# EAGLE board brush (EAGLE 9.5.1)
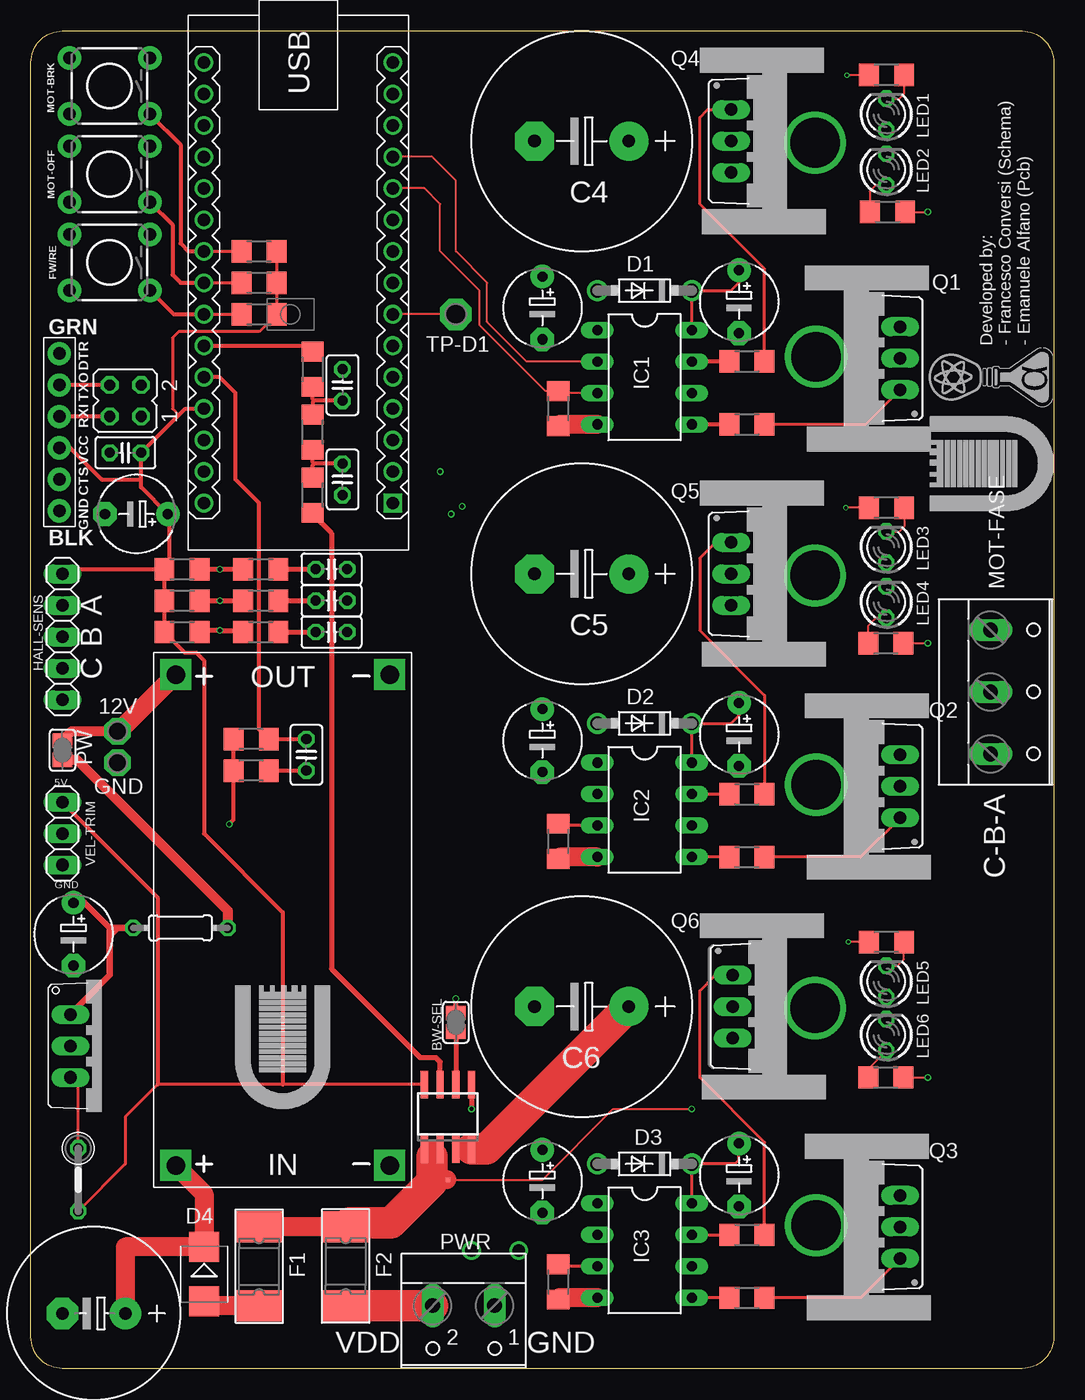
[diagram p0: board, top side]
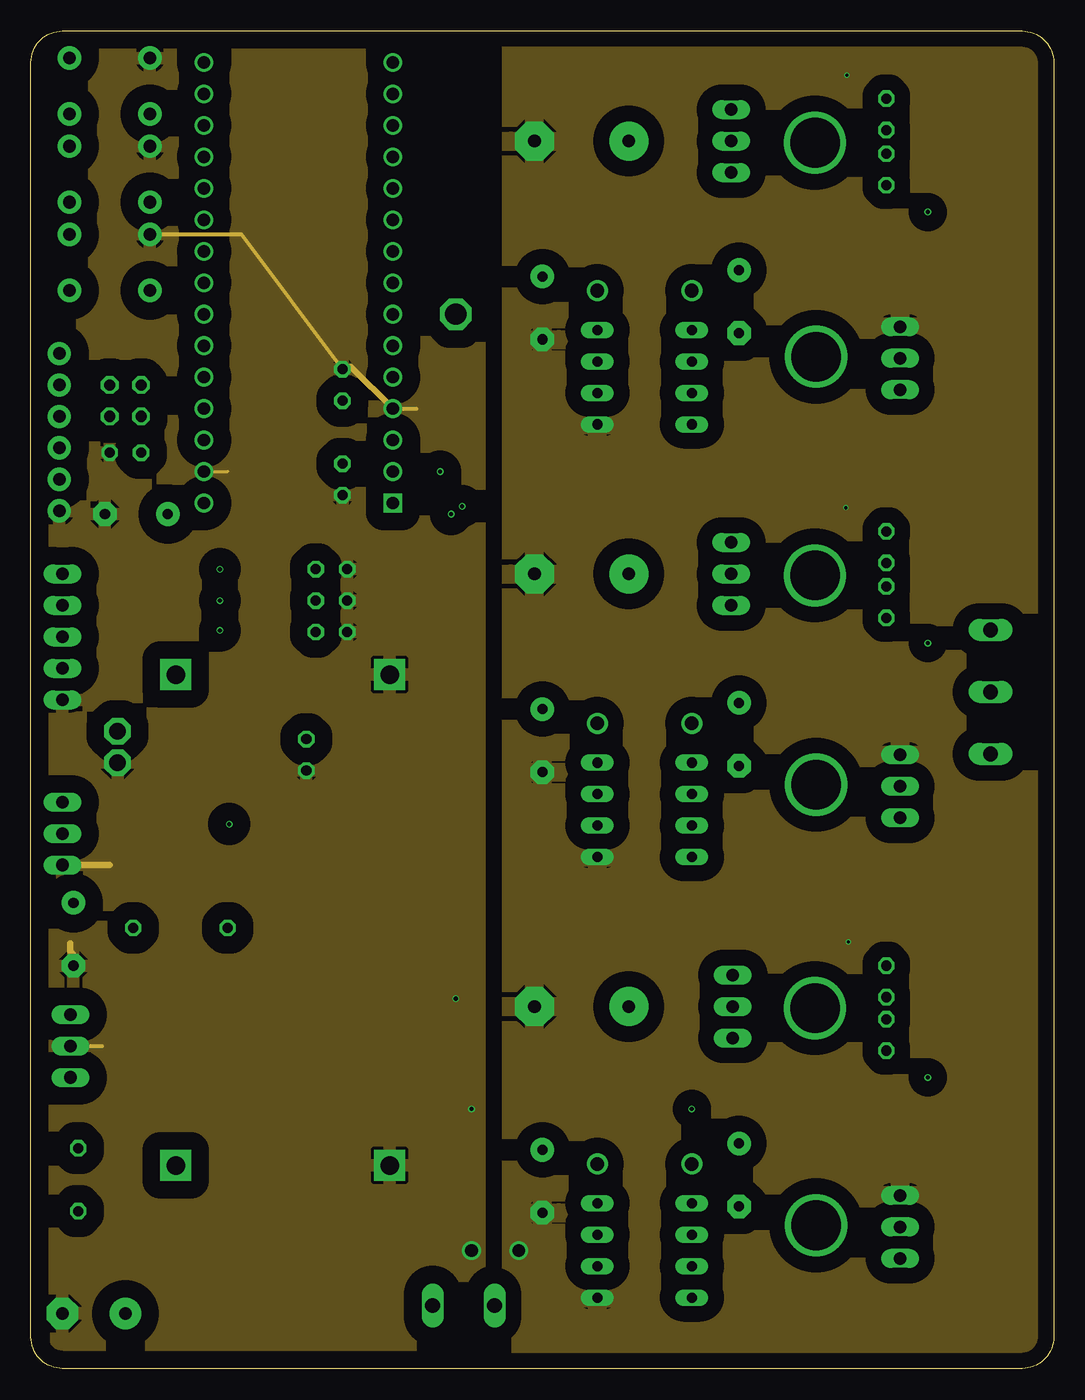
[diagram p1: board, inner layer Route2]
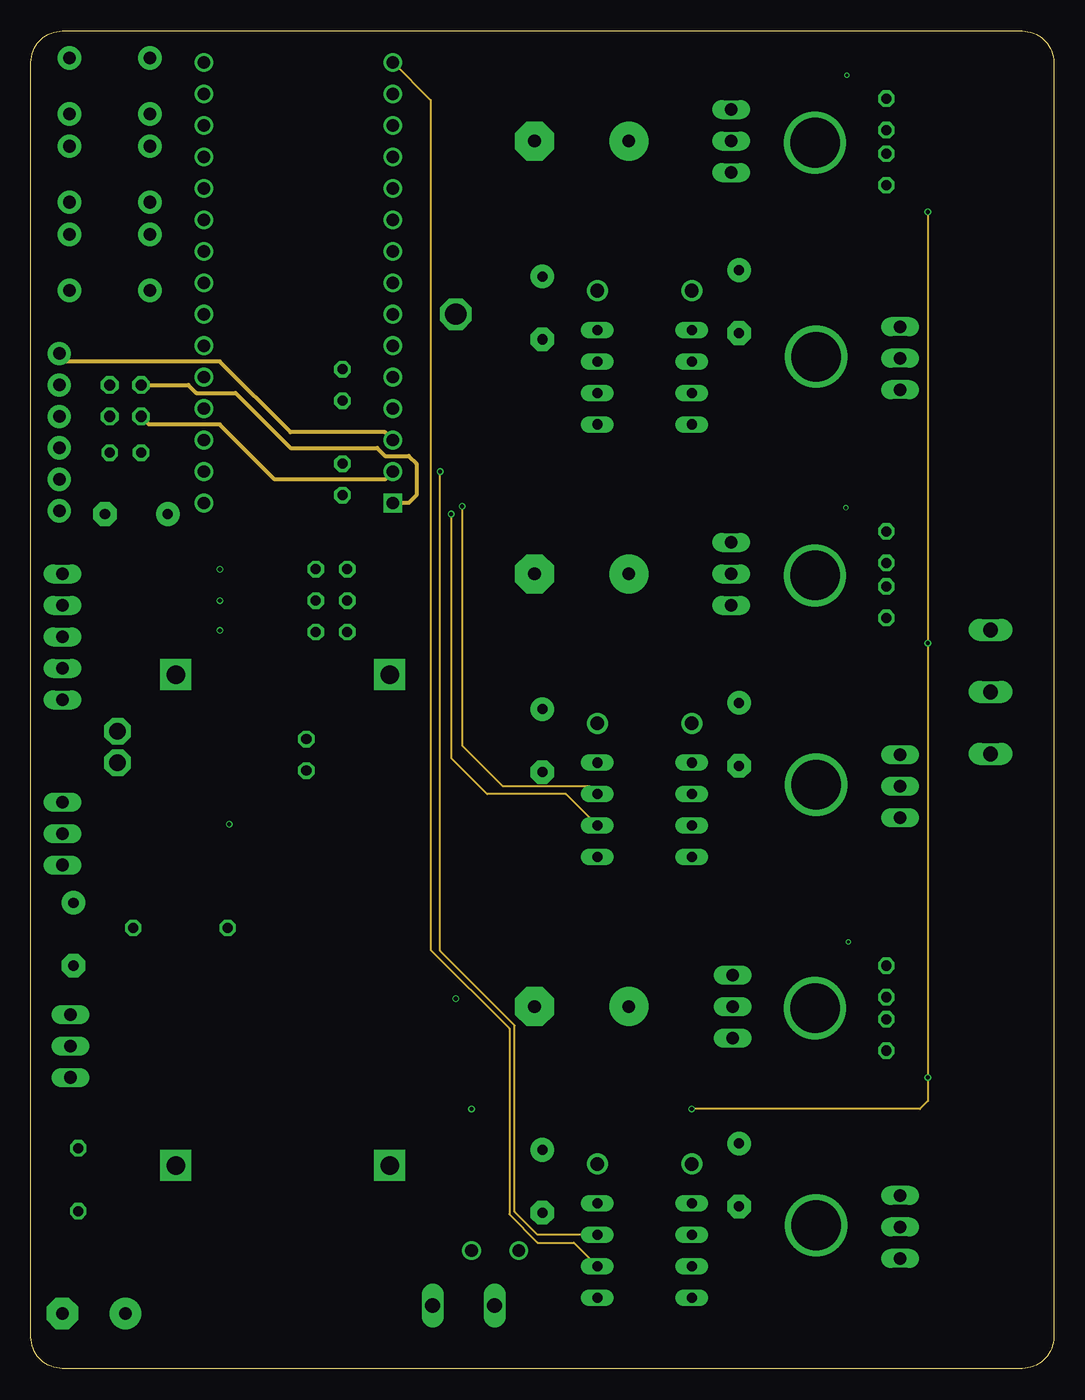
[diagram p2: board, inner layer Route15]
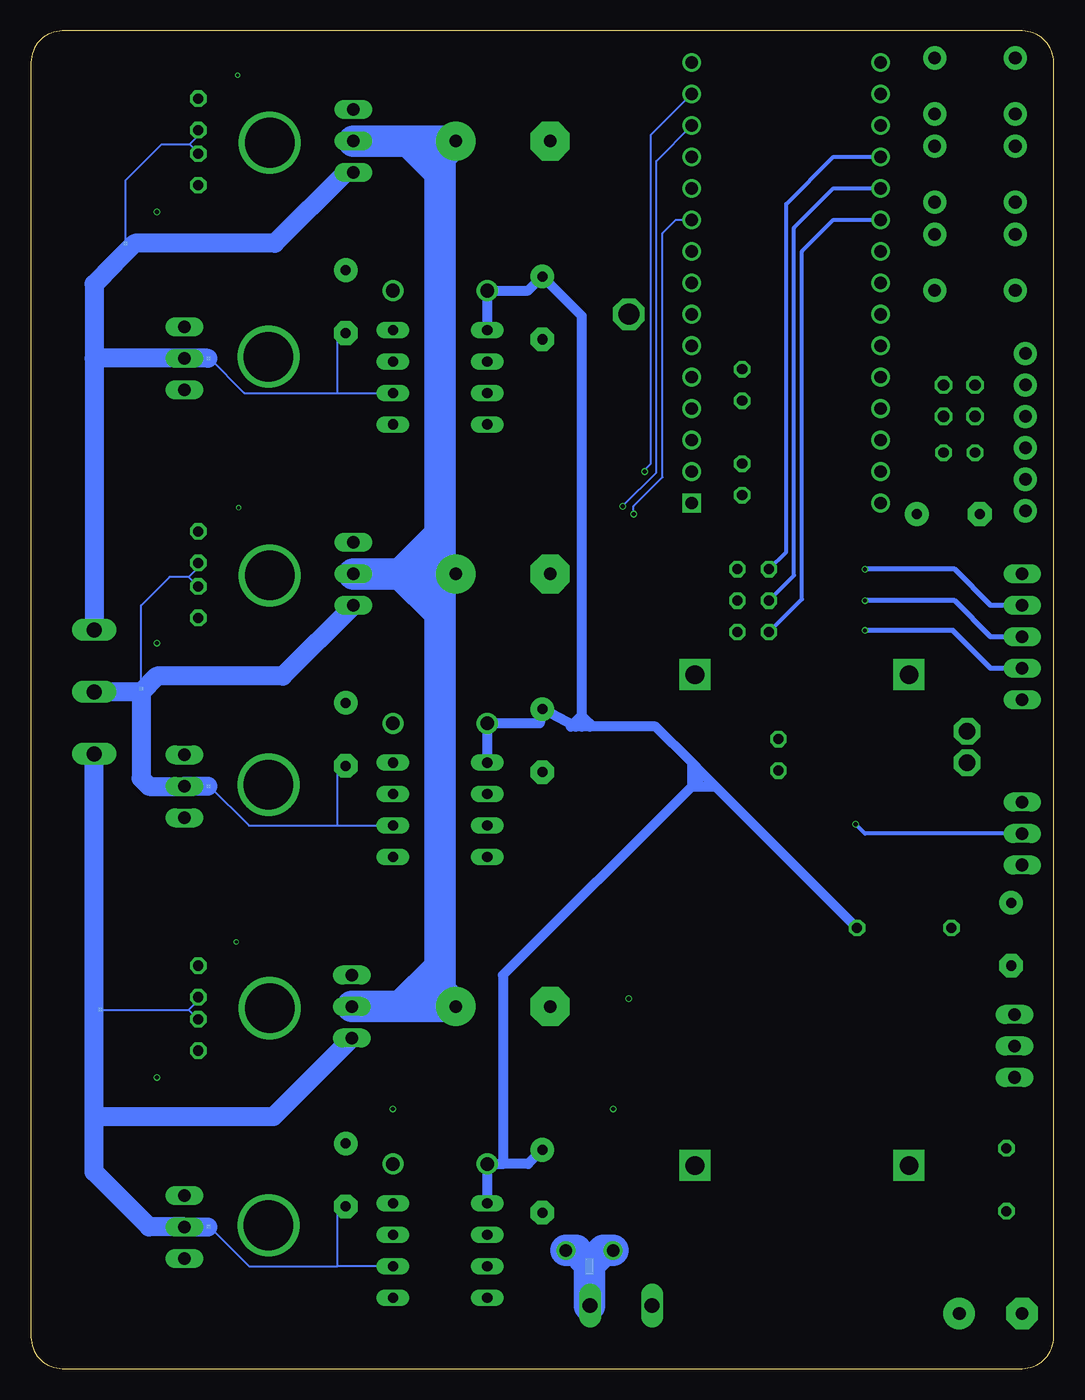
[diagram p3: board, bottom side, seen from below]

Size 82.55 x 107.95 mm. Coordinates in mm from the lower left corner, seen from the top.
Outline: 80.01,0 2.54,0 arc-90 0,2.54 0,105.41 arc-90 2.54,107.95 80.01,107.95 arc-90 82.55,105.41 82.55,2.54 arc-90 80.01,0
Copper layers (1+2*15+16): Top 0.035mm / dielectric 0.2mm / Route2 0.0175mm / dielectric 1.1mm / Route15 0.0175mm / dielectric 0.2mm / Bottom 0.035mm
Design rules "JLCPCB_4layer_DRU": minimum track width 3.5mil, minimum drill 0.2mm, track to track 3.5mil, track to pad 5mil, pad to pad 5mil, via to via 5mil, smd to smd 0mil, copper to edge 12mil, drill to drill 12mil, minimum pad ring 10mil, minimum via ring 3mil, stop-mask expansion 2mil, vias tented up to drill 100mil, thermal gap 10mil
Net classes: 0 default: width 0.152 mm, clearance 0.152 mm; 1 PWR_Mot: width 1.524 mm, drill 1.016 mm, clearance 0.305 mm; 2 PWR_logic: width 0.254 mm, drill 0.152 mm, clearance 0.203 mm; 3 AC_signal: width 0.152 mm, clearance 0.152 mm

## Footprints (pad centres in the part's own frame; a part is rotated, then mirrored left to right if it is on the bottom)
P1-13 = drill 1.321 pad 2.159 octagon: TP 0,0
SJ = smd 1.168 x 1.6: 1 -0.762,0; 2 0.762,0
E5-6 = drill 0.813 pad 1.905: + -2.54,0 | drill 0.813 pad 1.905 octagon: - 2.54,0
E7,5-18 = drill 1.016 pad 3.15: + -3.81,0 | drill 1.016 pad 3.15 octagon: - 3.81,0
C025-025X050 = drill 0.813 octagon: 1 -1.27,0; 2 1.27,0
E5-13 = drill 1.016 pad 2.54: + -2.54,0 | drill 1.016 pad 2.54 octagon: - 2.54,0
DO41-7.6 = drill 1.1 pad 1.7: A 3.81,0; C -3.81,0
SMB = smd 2.4 x 2.4: A 2.2,0; C -2.2,0
BELFUSE0679-3000-12 = smd 2.5 x 3.81: 1 -3.175,0; 2 3.175,0
TACTILE_SWITCH_PTH_6.0MM = drill 1.016 pad 1.88: 1 -3.251,2.261; 2 3.251,2.261; 3 -3.251,-2.261; 4 3.251,-2.261
1X05 = drill 1.016 long: 1 -5.08,0; 2 -2.54,0; 3 0,0; 4 2.54,0; 5 5.08,0
DIL08 = drill 0.813 long: 1 -3.81,-3.81; 2 -1.27,-3.81; 3 1.27,-3.81; 4 3.81,-3.81; 5 3.81,3.81; 6 1.27,3.81; 7 -1.27,3.81; 8 -3.81,3.81
SOIC8 = smd 0.6 x 2.2: 1 -1.905,-2.6; 2 -0.635,-2.6; 3 0.635,-2.6; 4 1.905,-2.6; 5 1.905,2.6; 6 0.635,2.6; 7 -0.635,2.6; 8 -1.905,2.6
TO220V = drill 1.016 long: 1 -2.54,-2.54; 2 0,-2.54; 3 2.54,-2.54
6_PIN_SERIAL_TARGET_SIDE_W_SILK = drill 1.016 pad 1.88: P$1 -6.35,0; P$2 -3.81,0; P$3 -1.27,0; P$4 1.27,0; P$5 3.81,0; P$6 6.35,0
JP2Q = drill 0.914 octagon: 1 -1.27,-1.27; 2 -1.27,1.27; 3 1.27,-1.27; 4 1.27,1.27
0207/5V = drill 0.813 octagon: 1 -2.54,0; 2 2.54,0
LED3MM = drill 0.813 octagon: A -1.27,0; K 1.27,0
ARDUINO-NANO-3.0 = drill 1 square: J1.1 17.78,7.62 | drill 1: J1.2 15.24,7.62; J1.3 12.7,7.62; J1.4 10.16,7.62; J1.5 7.62,7.62; J1.6 5.08,7.62; J1.7 2.54,7.62; J1.8 0,7.62; J1.9 -2.54,7.62; J1.10 -5.08,7.62; J1.11 -7.62,7.62; J1.12 -10.16,7.62; J1.13 -12.7,7.62; J1.14 -15.24,7.62; J1.15 -17.78,7.62; J2.1 17.78,-7.62; J2.2 15.24,-7.62; J2.3 12.7,-7.62; J2.4 10.16,-7.62; J2.5 7.62,-7.62; J2.6 5.08,-7.62; J2.7 2.54,-7.62; J2.8 0,-7.62; J2.9 -2.54,-7.62; J2.10 -5.08,-7.62; J2.11 -7.62,-7.62; J2.12 -10.16,-7.62; J2.13 -12.7,-7.62; J2.14 -15.24,-7.62; J2.15 -17.78,-7.62
W237-103 = drill 1.194 long: 1 -5,-1.29; 2 0,-1.29; 3 5,-1.29
DC-DC-STEP-DOWN-LM2596-ALFY = drill 1.5 pad 2.5 square: IN+ -19.812,9.906; IN- -19.812,-7.366; OUT+ 19.812,9.906; OUT- 19.812,-7.366
W237-102 = drill 1.194 long: 1 -2.5,-1.27; 2 2.5,-1.27
TO220BV = drill 1.016 long: D 0,-2.54; G -2.54,-2.54; S 2.54,-2.54
R1206 = smd 1.6 x 1.803: 1 -1.422,0; 2 1.422,0
0204/7 = drill 0.813 octagon: 1 -3.81,0; 2 3.81,0
P1-17 = drill 1.702 pad 2.54 octagon: TP 0,0
NET-NET_12X12MIL = smd 0.152 x 0.305: N1 -0.076,0; N2 0.076,0
TO-220 = drill 4: P$1 0.127,6.762
3NET-25X50MIL = smd 0.635 x 0.635: COM 0,0.318 | smd 0.318 x 0.635: S1 0.159,-0.318; S2 -0.159,-0.318
1X03 = drill 1.016 long: 1 -2.54,0; 2 0,0; 3 2.54,0

## Placement (x,y rotation side)
12V  TPSPAD1-13  [P1-13]  6.99,51.44 0 top
BW-SEL  [SJ]  34.29,27.94 270 top
C1  2.2u  [E5-6]  57.15,86.11 270 top
C2  2.2u  [E5-6]  57.15,51.18 270 top
C3  2.2u  [E5-6]  57.15,15.62 270 top
C4  270u/50V  [E7,5-18]  44.45,99.06 180 top
C5  270u/50V  [E7,5-18]  44.45,64.14 180 top
C6  270u/50V  [E7,5-18]  44.45,29.21 180 top
C7  10u  [E5-6]  41.27,85.6 270 top
C8  10u  [E5-6]  41.27,50.67 270 top
C9  10u  [E5-6]  41.27,15.11 270 top
C10  10n  [C025-025X050]  24.26,64.52 0 top
C11  10n  [C025-025X050]  24.26,61.98 0 top
C12  10n  [C025-025X050]  24.26,59.44 0 top
C13  10n  [C025-025X050]  22.23,49.53 270 top
C14  1n  [C025-025X050]  25.15,71.75 270 top
C15  10n  [C025-025X050]  25.15,79.38 90 top
C16  10u  [E5-6]  8.51,68.96 180 top
C17  100n  [C025-025X050]  7.62,73.91 180 top
C18  470u/50V  [E5-13]  5.08,4.45 180 top
C19  10u  [E5-6]  3.43,35.05 270 top
D1  1N5819-B  [DO41-7.6]  49.53,87 180 top
D2  1N5819-B  [DO41-7.6]  49.53,52.07 180 top
D3  1N5819-B  [DO41-7.6]  49.53,16.51 180 top
D4  ES2D  [SMB]  13.97,7.62 270 top
F1  2410-BOX  [BELFUSE0679-3000-12]  18.41,8.26 90 top
F2  2410-BOX  [BELFUSE0679-3000-12]  25.4,8.26 270 top
FW/RE  MOMENTARY-SWITCH-SPST-PTH-6.0MM  [TACTILE_SWITCH_PTH_6.0MM]  6.35,89.28 180 top
GND  TPSQPAD1-13  [P1-13]  6.99,48.9 180 top
HALL-SENS  [1X05]  2.54,59.05 270 top
IC1  IR2108D  [DIL08]  49.53,80.01 270 top
IC2  IR2108D  [DIL08]  49.53,45.09 270 top
IC3  IR2108D  [DIL08]  49.53,9.53 270 top
IC4  ACS723  [SOIC8]  33.66,20.32 0 top
IC5  7805TV  [TO220V]  5.71,26.04 270 top
J1  [6_PIN_SERIAL_TARGET_SIDE_W_SILK]  2.29,75.56 270 top
JP1  [JP2Q]  7.62,78.11 90 top
L1  10u  [0207/5V]  3.81,15.24 270 top
LED1  [LED3MM]  69.05,101.22 90 top
LED2  [LED3MM]  69.05,96.77 90 top
LED3  [LED3MM]  69.05,66.29 90 top
LED4  [LED3MM]  69.05,61.85 90 top
LED5  [LED3MM]  69.05,31.24 90 top
LED6  [LED3MM]  69.05,26.92 90 top
M1  ARDUINO-NANO-3.0  [ARDUINO-NANO-3.0]  21.59,87.63 270 top
MOT-BRK  MOMENTARY-SWITCH-SPST-PTH-6.0MM  [TACTILE_SWITCH_PTH_6.0MM]  6.35,103.5 180 top
MOT-FASE  [W237-103]  78.74,54.61 270 top
MOT-OFF  MOMENTARY-SWITCH-SPST-PTH-6.0MM  [TACTILE_SWITCH_PTH_6.0MM]  6.35,96.39 180 top
PW  [SJ]  2.54,49.91 270 top
PW$1  DC/DC-STEP-DOWNOLD-ALFY  [DC-DC-STEP-DOWN-LM2596-ALFY]  21.59,36.2 90 top
PWR  [W237-102]  34.92,3.81 180 top
Q1  IRFB4310  [TO220BV]  67.61,81.53 90 top
Q2  IRFB4310  [TO220BV]  67.61,46.99 90 top
Q3  IRFB4310  [TO220BV]  67.61,11.43 90 top
Q4  IRFB4310  [TO220BV]  59.05,99.06 270 top
Q5  IRFB4310  [TO220BV]  59.05,64.14 270 top
Q6  IRFB4310  [TO220BV]  59.18,29.21 270 top
R1  22  [R1206]  57.78,81.28 180 top
R2  22  [R1206]  57.78,76.2 180 top
R3  22  [R1206]  57.78,46.35 180 top
R4  22  [R1206]  57.78,41.27 180 top
R5  22  [R1206]  57.78,10.79 180 top
R6  22  [R1206]  57.78,5.71 180 top
R7  10k  [R1206]  42.55,77.47 90 top
R8  10k  [R1206]  42.55,42.55 90 top
R9  10k  [R1206]  42.55,6.99 90 top
R10  100  [R1206]  22.73,80.64 90 top
R11  1k  [R1206]  22.73,75.56 270 top
R12  1k  [R1206]  22.73,70.48 270 top
R13  1k  [R1206]  18.54,64.52 180 top
R14  1k  [R1206]  18.54,61.98 180 top
R15  1k  [R1206]  18.54,59.44 180 top
R16  1k  [R1206]  17.78,50.8 0 top
R17  47k  [R1206]  17.78,48.26 0 top
R18  22  [0204/7]  12.06,35.56 0 top
R19  1k  [R1206]  12.19,64.52 180 top
R20  1k  [R1206]  12.19,61.98 180 top
R21  1k  [R1206]  12.19,59.44 180 top
R100  5.6k  [R1206]  18.41,90.17 180 top
R101  5.6k  [R1206]  18.41,87.63 180 top
R102  5.6k  [R1206]  18.41,85.09 180 top
R103  5.6k  [R1206]  69.05,34.42 0 top
R104  5.6k  [R1206]  69,23.5 180 top
R105  5.6k  [R1206]  69.05,69.47 0 top
R106  5.6k  [R1206]  69,58.55 180 top
R107  5.6k  [R1206]  69.05,104.39 0 top
R108  5.6k  [R1206]  69.13,93.34 180 top
TP-D1  PTR1PAD1-17  [P1-17]  34.29,85.09 0 top
U$1  NET12X12  [NET-NET_12X12MIL]  74.93,90.81 270 bottom
U$2  NET12X12  [NET-NET_12X12MIL]  73.66,54.86 270 bottom
U$3  DISSTO-220  [TO-220]  70.14,81.53 90 top
U$4  DISSTO-220  [TO-220]  70.14,46.99 90 top
U$6  NET12X12  [NET-NET_12X12MIL]  76.96,28.96 180 bottom
U$7  DISSTO-220  [TO-220]  70.14,11.43 90 top
U$8  DISSTO-220  [TO-220]  56.52,99.06 270 top
U$9  DISSTO-220  [TO-220]  56.52,64.14 270 top
U$10  DISSTO-220  [TO-220]  56.52,29.21 270 top
U$11  NET12X12  [NET-NET_12X12MIL]  68.2,81.53 180 bottom
U$12  NET12X12  [NET-NET_12X12MIL]  68.2,11.43 180 bottom
U$13  NET12X12  [NET-NET_12X12MIL]  68.2,46.99 180 bottom
U$14  NET12X12  [NET-NET_12X12MIL]  33.66,15.24 180 top
U$15  [TOR_10MM]  20.32,26.67 0 top
U$16  [TOR_10MM]  76.83,73.03 90 top
U$17  [ALFY_10MM]  77.47,80.01 90 top
U$100  3NET25X50MIL  [3NET-25X50MIL]  37.47,8.26 180 bottom
VEL-TRIM  [1X03]  2.54,43.18 270 top

## Library data of the parts
12V GND TP-D1 = testpad
BW-SEL JP1 PW = jumper
C1-C19 = rcl; SPICEPREFIX: C
D1-D4 = diode
F1 F2 = polyfuse-smd_10
FW/RE MOT-BRK MOT-OFF = SparkFun-Switches; PROD_ID: SWCH-08441; SF_SKU: COM-00097
HALL-SENS VEL-TRIM = pinhead
IC1-IC3 = irs
IC4 = allegro-2
IC5 = linear
J1 = SparkFun-Connectors
L1 = rcl; SPICEPREFIX: L
LED1-LED6 = led
M1 PW$1 = diy-modules
MOT-FASE = con-wago-500; MPN: 237-103; OC_FARNELL: unknown; OC_NEWARK: 18M7116
PWR = con-wago-500; MPN: 237-102; OC_FARNELL: unknown; OC_NEWARK: 70K9898
Q1-Q6 = transistor-power
R1-R21 R100-R108 = rcl; SPICEPREFIX: R
U$1 U$2 U$6 U$11-U$14 U$100 = junctions_net
U$3 U$4 U$7-U$10 = diss
U$15-U$17 = loghi

## Nets
3V3: M1.J2.14
+5V [PWR_logic]: C16.+ C17.1 HALL-SENS.1 IC4.8 J1.P$4 L1.2 M1.J2.4 R19.2 R20.2 R21.2 R100.1 R101.1 R102.1 VEL-TRIM.1
+12V [PWR_logic]: C7.+ C8.+ C9.+ D1.A D2.A D3.A IC1.1 IC2.1 IC3.1 PW.2 R18.2
A [PWR_Mot]: MOT-FASE.1 Q1.D Q4.S U$1.N2 U$11.N2
A-SENS [AC_signal]: LED1.A LED2.K U$1.N1
B [PWR_Mot]: MOT-FASE.2 Q2.D Q5.S U$2.N2 U$13.N2
B-SENS [AC_signal]: LED3.A LED4.K U$2.N1
C [PWR_Mot]: MOT-FASE.3 Q3.D Q6.S U$6.N2 U$12.N2
C-SENS [AC_signal]: LED5.A LED6.K U$6.N1
F-A: HALL-SENS.2 R13.2 R19.1
F-B: HALL-SENS.3 R14.2 R20.1
F-C: HALL-SENS.4 R15.2 R21.1
FW/RE: FW/RE.1 M1.J2.7 R102.2
GND [PWR_logic]: BW-SEL.1 C10.2 C11.2 C12.2 C13.2 C14.2 C15.2 C16.- C17.2 C18.- C19.- FW/RE.3 GND.TP HALL-SENS.5 IC4.5 IC5.2 J1.P$6 M1.J1.4 M1.J2.2 MOT-BRK.3 MOT-OFF.3 PW$1.IN- PW$1.OUT- R17.2 U$100.S2 VEL-TRIM.3
I_MOT: M1.J2.6 R10.2
IN_A: IC1.3 M1.J1.11 R7.2
IN_B: IC2.3 M1.J1.10 R8.2
IN_C: IC3.3 M1.J1.15 R9.2
MOT_BRK: M1.J2.9 MOT-BRK.1 R100.2
MOT_OFF: M1.J2.8 MOT-OFF.1 R101.2
N$1 [PWR_logic]: IC1.7 R1.2
N$2 [PWR_logic]: IC1.5 R2.2
N$3 [PWR_logic]: Q4.G R1.1
N$4 [PWR_logic]: Q1.G R2.1
N$5 [PWR_logic]: IC2.7 R3.2
N$6 [PWR_logic]: Q5.G R3.1
N$7 [PWR_logic]: IC2.5 R4.2
N$8 [PWR_logic]: Q2.G R4.1
N$9 [PWR_logic]: IC3.7 R5.2
N$10 [PWR_logic]: Q6.G R5.1
N$11 [PWR_logic]: IC3.5 R6.2
N$12 [PWR_logic]: Q3.G R6.1
N$13 [PWR_Mot]: F2.2 PWR.2
N$14 [PWR_logic]: 12V.TP PW$1.OUT+ PW.1
N$16 [PWR_Mot]: D4.A F1.1
N$18 [PWR_Mot]: PWR.1 U$100.COM
N$19 [AC_signal]: LED2.A R108.2
N$20 [AC_signal]: LED1.K R107.2
N$21: C13.1 M1.J2.5 R16.2
N$22 [AC_signal]: LED4.A R106.2
N$23 [AC_signal]: LED3.K R105.2
N$24: M1.J1.7 TP-D1.TP
N$25 [AC_signal]: LED6.A R104.2
N$26 [AC_signal]: LED5.K R103.2
N$27 [PWR_Mot]: C18.+ D4.C PW$1.IN+
N$28: C15.1 R10.1 R11.1
N$29: IC4.7 R12.2
N$30 [PWR_logic]: C19.+ IC5.1 R18.1
N$31 [PWR_logic]: IC5.3 L1.1
N$32: BW-SEL.2 IC4.6
N$33: R16.1 R17.1 VEL-TRIM.2
N$34: J1.P$2 JP1.4
N$35: J1.P$3 JP1.2
N$36: C14.1 R11.2 R12.1
PHASE_A: C10.1 M1.J2.12 R13.1
PHASE_B: C11.1 M1.J2.11 R14.1
PHASE_C: C12.1 M1.J2.10 R15.1
PWM_A: IC1.2 M1.J1.12
PWM_B: IC2.2 M1.J1.13
PWM_C: IC3.2 M1.J1.14
RESET: J1.P$1 M1.J1.3
RXD: JP1.1 M1.J1.2
TXD: JP1.3 M1.J1.1
V+ [PWR_Mot]: F1.2 F2.1 IC4.1 IC4.2 U$14.N2
VBA [PWR_logic]: C1.+ D1.C IC1.8
VBB [PWR_logic]: C2.+ D2.C IC2.8
VBC [PWR_logic]: C3.+ D3.C IC3.8
VCCINT [AC_signal]: R104.1 R106.1 R108.1 U$14.N1
VDD [PWR_Mot]: C4.+ C5.+ C6.+ IC4.3 IC4.4 Q4.D Q5.D Q6.D
VIN: M1.J2.1
VS-A [AC_signal]: C1.- IC1.6 U$11.N1
VS-B [AC_signal]: C2.- IC2.6 U$13.N1
VS-C [AC_signal]: C3.- IC3.6 U$12.N1
VSS [PWR_Mot]: C4.- C5.- C6.- C7.- C8.- C9.- IC1.4 IC2.4 IC3.4 Q1.S Q2.S Q3.S R7.1 R8.1 R9.1 R103.1 R105.1 R107.1 U$100.S1

## Tracks (layer width: path | path; a pad name or v marks a point on that pad's centre or on a via)
+5V
  Top 0.254: IC4.8 20.32,22.92 10.22,22.92 7.62,20.32 7.62,16.51 L1.2 | R100.1 R101.1 R102.1 18.44,83.69 11.94,83.69 11.43,83.19 11.43,77.47 11.94,76.96
  Top 0.305: HALL-SENS.1 2.92,64.52 R19.2 | R19.2 R20.2 R21.2 12.42,57.78 13.34,57.78 13.97,57.15 13.97,43.18 20.32,36.83 20.32,22.92 | R19.2 11.15,64.9 11.15,68.86 C16.+ 8.89,71.12 8.89,71.75 | 8.89,71.75 C17.1 11.94,76.96 12.45,77.47 M1.J2.4 | VEL-TRIM.1 10.22,38.04 10.22,22.92 | J1.P$4 3.17,74.3 5.71,71.75 8.89,71.75
+12V
  Top 0.813: PW.2 3.68,49.15 15.88,36.96 R18.2
  Bottom 0.813: R18.2 27.3,46.99 | 27.3,46.99 28.26,47.94 | 28.26,47.94 29.21,48.9 | 29.21,48.9 32.13,51.82 37.47,51.82 | 37.47,51.82 38.1,51.82 | 38.1,51.82 38.6,51.82 | 38.6,51.82 38.99,51.82 38.1,52.7 | 38.6,51.82 C8.+ 41.5,52.07 D2.A IC2.1 | 44.45,16.51 44.45,31.75 29.21,46.99 | 44.45,16.51 D3.A IC3.1 | 29.21,46.99 28.26,47.94 | IC1.1 D1.A 42.42,87 C7.+ 38.1,84.96 38.1,52.7 | 38.1,51.82 38.1,52.7 | 38.1,52.7 37.47,52.07 37.47,51.82 | 29.21,48.9 29.21,46.99 | 29.21,46.99 27.3,46.99 | C9.+ 42.42,16.51 44.45,16.51
A
  Bottom 0.406: U$1.N2 74.93,90.04 75.82,89.15
  Bottom 1.524: Q4.S 57.15,96.52 62.87,90.81 74.17,90.81 75.82,89.15 77.45,87.52 77.45,81.53 | 77.45,81.53 MOT-FASE.1 | 77.45,81.53 Q1.D U$11.N2
A-SENS
  Bottom 0.152: 69.72,98.81 72.01,98.81 74.93,95.89 U$1.N1 | 69.72,98.81 69.05,98.13 LED2.K | 69.72,98.81 69.05,99.48 LED1.A
B
  Bottom 0.406: U$2.N2 73.84,54.61 MOT-FASE.2
  Bottom 1.524: Q5.S 62.23,55.88 72.39,55.88 73.66,54.61 | 73.66,54.61 MOT-FASE.2 | 73.66,54.61 73.66,47.62 73.03,46.99 Q2.D U$13.N2
B-SENS
  Bottom 0.152: U$2.N1 73.66,61.59 71.37,63.88 69.81,63.88 | LED4.K 69.81,63.88 | LED3.A 69.05,64.64 69.81,63.88
C
  Bottom 0.152: U$6.N2 77.45,29.37 77.45,31.11
  Bottom 1.524: Q6.S 62.99,20.32 77.34,20.32 77.45,20.43 | 77.45,20.43 77.45,31.11 MOT-FASE.3 | 77.45,20.43 77.45,15.86 73.03,11.43 Q3.D U$12.N2
C-SENS
  Bottom 0.152: LED6.K 69.81,28.96 | U$6.N1 69.81,28.96 | 69.81,28.96 69.05,29.72 LED5.A
F-A  (via drill 0.35)
  Top 0.406: R13.2 v15.24,64.52 R19.1
  Bottom 0.406: HALL-SENS.2 5.08,61.59 8,64.52 v15.24,64.52
F-B  (via drill 0.35)
  Top 0.406: R14.2 v15.24,61.98 R20.1
  Bottom 0.406: HALL-SENS.3 5.08,59.05 8,61.98 v15.24,61.98
F-C  (via drill 0.35)
  Top 0.406: R15.2 16.99,59.56 v15.24,59.56 13.74,59.56 R21.1
  Bottom 0.406: HALL-SENS.4 5.08,56.52 8.13,59.56 v15.24,59.56
FW/RE
  Top 0.254: M1.J2.7 R102.2
  Top 0.305: FW/RE.1 11.53,85.09 M1.J2.7
GND  (via drill 0.35, 1.02)
  Top 0.305: R17.2 C13.2
  Top 0.406: BW-SEL.1 v34.29,29.84 | IC4.5 v35.56,20.95
  Route2 0.254: M1.J2.2 15.88,72.39
  Route2 0.305: IC5.2 5.71,26.04 | FW/RE.3 16.97,91.54 25.01,80.83 C15.2 | M1.J1.4 31.11,77.47
  Route2 0.508: M1.J1.4 25.85,80.83 25.01,80.83 | C19.- 3.43,33.4 3.17,33.66 3.17,34.29 | VEL-TRIM.3 6.35,40.64
  Bottom 2.54: U$100.S2 36.35,9.53 v35.56,9.53
  pour Route2 (isolate 1.422): 36.2,-3.81 36.2,119.38 -4.45,119.38 -4.45,-3.81
I_MOT
  Top 0.305: M1.J2.6 22.25,82.55 R10.2
IN_A
  Top 0.152: IC1.3 42.7,78.74 R7.2 41.53,78.89 36.2,84.23 36.2,87 33.02,90.17 33.02,93.98 31.75,95.25 M1.J1.11
IN_B  (via drill 0.35)
  Top 0.254: IC2.3 42.7,43.81 R8.2
  Route15 0.152: IC2.3 43.18,46.35 36.83,46.35 33.91,49.28 v33.91,68.96
  Bottom 0.152: M1.J1.10 30.48,92.71 31.57,91.62 31.57,71.93 33.91,69.6 v33.91,68.96
IN_C
  Top 0.254: IC3.3 42.7,8.26 R9.2
  Route15 0.152: M1.J1.15 32.26,102.36 32.26,33.78 38.61,27.43 38.61,12.45 40.89,10.16 43.81,10.16 IC3.3
MOT_BRK
  Top 0.254: M1.J2.9 R100.2
  Top 0.305: MOT-BRK.1 12.06,98.78 12.06,90.81 12.7,90.17 M1.J2.9
MOT_OFF
  Top 0.254: M1.J2.8 R101.2
  Top 0.305: MOT-OFF.1 11.43,92.3 11.43,88.27 12.06,87.63 M1.J2.8
N$1
  Top 0.305: R1.2 IC1.7
N$2
  Top 0.305: R2.2 IC1.5
N$3
  Top 0.254: R1.1 59.21,88.75 53.98,93.98 53.98,100.97 54.61,101.6 Q4.G
N$4
  Top 0.254: Q1.G 67.36,76.2 R2.1
N$5
  Top 0.254: IC2.7 R3.2
N$6
  Top 0.254: Q5.G 55.24,66.67 53.98,65.41 53.98,59.56 59.21,54.33 R3.1
N$7
  Top 0.254: R4.2 IC2.5
N$8
  Top 0.254: Q2.G 66.98,41.27 R4.1
N$9
  Top 0.254: IC3.7 R5.2
N$10
  Top 0.254: R5.1 59.21,18.26 53.98,23.5 53.98,30.48 55.24,31.75 Q6.G
N$11
  Top 0.254: R6.2 IC3.5
N$12
  Top 0.254: Q3.G 66.98,5.71 R6.1
N$13
  Top 2.54: PWR.2 F2.2
N$14
  Top 0.813: PW.1 3.3,51.44 12V.TP
  Top 1.524: PW$1.OUT+ 7.11,51.44 12V.TP
N$16
  Top 1.524: F1.1 14.31,5.08 D4.A
N$18
  Bottom 1.524: 37.47,5.08 PWR.1
  Bottom 2.54: U$100.COM 37.47,5.08
N$19
  Top 0.152: LED2.A 68.2,95.5 67.71,95.01 R108.2
N$20
  Top 0.152: LED1.K 70.1,102.49 70.48,102.87 70.48,104.38 R107.2
N$21
  Top 0.305: C13.1 R16.2 18.41,51.59 18.41,69.85 16.51,71.75 16.51,78.74 15.24,80.01 M1.J2.5
N$22
  Top 0.152: LED4.A 68.2,60.58 67.58,59.96 R106.2
N$23
  Top 0.152: LED3.K 70.1,67.56 70.48,67.94 70.48,69.45 R105.2
N$24
  Top 0.152: TP-D1.TP M1.J1.7
N$25
  Top 0.152: R104.2 67.58,24.19 LED6.A
N$26
  Top 0.152: LED5.K 69.94,32.51 70.47,33.04 70.47,34.29
  Top 0.254: 70.47,34.29 R103.2
N$27
  Top 1.524: PW$1.IN+ 13.97,14.1 D4.C 7.62,9.82 C18.+
N$28
  Top 0.305: C15.1 22.86,78.11 | 22.86,78.11 22.73,77.98 R11.1 | 22.86,78.11 22.73,78.23 R10.1
N$29
  Top 0.406: R12.2 22.73,68.94 24.26,67.41 24.26,32.26 31.43,25.08 32.7,25.08 33.02,24.77 IC4.7
N$30
  Top 0.254: 6.35,31.75 6.35,34.92 6.35,35.56 6.99,35.56 R18.1
  Top 0.508: 6.99,35.56 6.35,34.92 | R18.1 6.35,35.56 | 6.35,35.56 6.35,31.75 IC5.1 | C19.+ 4.32,37.59 6.35,35.56
N$31
  Top 0.254: L1.1 3.81,22.86 IC5.3
N$32
  Top 0.406: BW-SEL.2 IC4.6
N$33  (via drill 0.35)
  Top 0.305: v16,43.94 16.36,44.3 R17.1 R16.1
  Bottom 0.305: VEL-TRIM.2 15.24,43.18 v16,43.94
N$34
  Top 0.305: JP1.4 J1.P$2
N$35
  Top 0.305: JP1.2 J1.P$3
N$36
  Top 0.305: C14.1 22.86,73.03 | 22.86,73.03 22.73,73.15 R11.2 | R12.1 22.73,72.9 22.86,73.03
PHASE_A
  Top 0.406: R13.1 C10.1
  Bottom 0.305: C10.1 21.59,65.91 21.59,93.98 17.78,97.79 M1.J2.12
PHASE_B
  Top 0.406: R14.1 C11.1
  Bottom 0.305: C11.1 20.95,64.01 20.95,92.08 17.78,95.25 M1.J2.11
PHASE_C
  Top 0.406: R15.1 C12.1
  Bottom 0.305: C12.1 20.32,62.1 20.32,90.17 17.78,92.71 M1.J2.10
PWM_A
  Top 0.152: M1.J1.12 32.38,97.79 34.29,95.89 34.29,90.17 36.83,87.63 36.83,84.45 40.01,81.28 IC1.2
PWM_B  (via drill 0.35)
  Route15 0.152: IC2.2 45.09,46.99 38.1,46.99 34.8,50.29 v34.8,69.6
  Bottom 0.152: v34.8,69.6 32.08,72.31 32.08,97.46 M1.J1.13
PWM_C  (via drill 0.35)
  Route15 0.152: IC3.2 40.89,10.79 39.04,12.65 39.04,27.68 33.02,33.7 v33.02,72.39
  Bottom 0.152: v33.02,72.39 33.02,72.52 32.51,73.03 32.51,99.57 M1.J1.14
RESET
  Route15 0.305: M1.J1.3 28.57,75.56 20.95,75.56 15.24,81.28 2.92,81.28 J1.P$1
RXD
  Route15 0.305: M1.J1.2 28.57,71.75 19.68,71.75 15.24,76.2 9.53,76.2 JP1.1
TXD
  Route15 0.305: JP1.3 12.7,79.38 13.34,78.74 16.51,78.74 20.95,74.3 27.94,74.3 28.57,73.66 30.48,73.66 31.11,73.03 31.11,70.48 30.48,69.85 M1.J1.1
V+
  Top 0.305: IC4.2 32.38,17.09 IC4.1
  Top 1.524: F2.1 F1.2 | U$14.N2 32.54,15.24 31.19,13.89
  Top 2.54: F2.1 25.73,11.76 29.06,11.76 31.19,13.89 32.38,15.09 32.38,17.09
VBA
  Top 0.254: IC1.8 D1.C 56.52,87 57.15,87.63 C1.+
VBB
  Top 0.254: IC2.8 D2.C 56.52,52.07 57.15,52.7 C2.+
VBC
  Top 0.254: IC3.8 D3.C 56.82,16.51 57.15,16.84 C3.+
VCCINT  (via drill 0.35)
  Top 0.152: U$14.N1 41.27,15.24 46.99,20.95 v53.34,20.95 | R108.1 v72.39,93.34 | R106.1 v72.39,58.55 | R104.1 v72.39,23.5
  Route15 0.152: v72.39,93.34 v72.39,58.55 v72.39,23.5 72.39,21.59 71.75,20.95 v53.34,20.95
VDD
  Top 0.305: IC4.3 IC4.4
  Top 2.54: IC4.4 36.77,17.72 C6.+
  Bottom 2.54: 52.7,29.21 50.16,29.21 | Q5.D 52.7,64.14 | 52.7,64.14 50.16,64.14 | 49.53,60.96 49.53,63.5 50.16,64.14 | 49.53,60.96 49.53,32.38 | 49.53,30.48 49.53,29.84 50.16,29.21 | 49.53,67.31 49.53,64.77 50.16,64.14 | 50.16,29.21 C6.+ 49.53,30.48 | 52.7,29.21 Q6.D | 49.53,32.38 49.53,30.48 | 49.53,32.38 52.7,29.21 | 49.53,60.96 52.7,64.14 | 49.53,67.31 52.7,64.14 | 49.53,96.52 52.07,99.06 Q4.D C4.+ 49.53,97.79 49.53,96.52 | 49.53,96.52 49.53,67.31 | C5.+ 50.16,64.14
VS-A
  Bottom 0.152: 57.78,78.74 IC1.6 | U$11.N1 65.33,78.74 57.78,78.74 | C1.- 57.78,82.93 57.78,78.74
VS-B
  Bottom 0.152: 57.78,43.81 IC2.6 | U$13.N1 64.95,43.81 57.78,43.81 | C2.- 57.78,48.01 57.78,43.81
VS-C
  Bottom 0.152: IC3.6 57.78,8.26 | U$12.N1 64.95,8.26 57.78,8.26 | C3.- 57.78,12.45 57.78,8.26
VSS  (via drill 0.25, 1.02)
  Top 0.152: R103.1 v65.97,34.42 | R105.1 v65.79,69.47 | R107.1 v65.85,104.39
  Top 1.524: IC1.4 42.7,76.2 R7.1 | IC2.4 42.7,41.27 R8.1 | IC3.4 42.7,5.71 R9.1
  Bottom 2.54: U$100.S1 38.58,9.53 v39.37,9.53
  pour Route2 (isolate 1.27): 97.16,119.38 38.73,119.38 38.73,-3.81 97.16,-3.81

## Text on the board
tPlace: A | B | C | C-B-A
tNames: Developed by: / - Francesco Conversi (Schema) / - Emanuele Alfano (Pcb) | 5V | GND | VDD | GND